# Altium PCB glasses_full_v1_small.PcbDoc (part 2 of 2)
Units mil, origin at the board's own origin, x right, y up, seen from the top; angles counter-clockwise.
Board outline 5946.88 x 2377.05 mil, 2 copper layers (Top Layer, Bottom Layer); 34 components, 50 nets, 179 pads, 116 vias.
Unrouted connection lines stored in the file: 2.
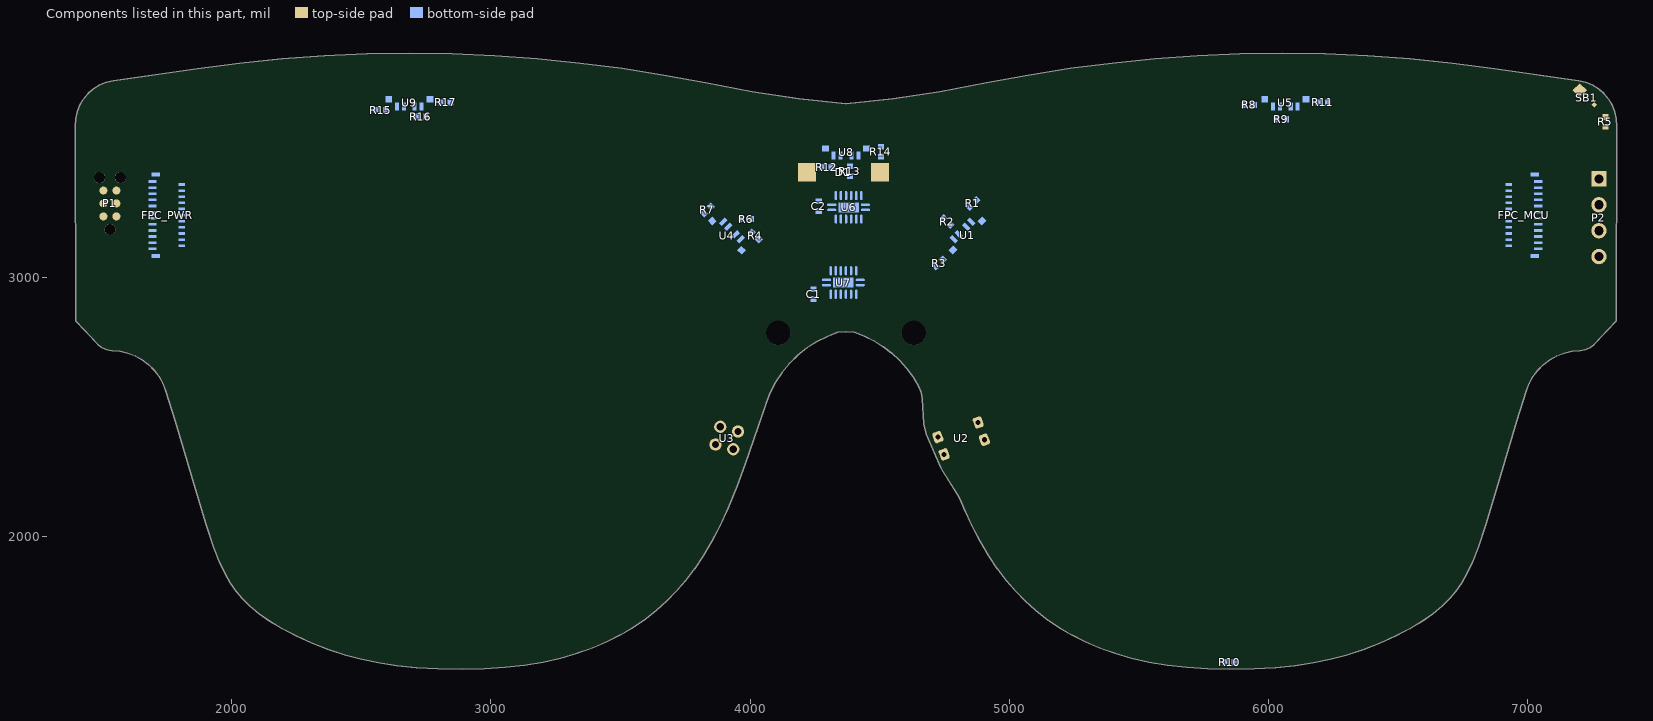
[diagram p2: the components of this part, seen from the top]

## Polygon pours and split planes (outlines as drawn) (continued)
no net on Keep-Out Layer "hol7" (none, remove dead copper): 7137.47,2923.81 7143.75,2923.31 7149.87,2921.83 7155.69,2919.4 7161.04,2916.08 7165.8,2911.95 7169.85,2907.13 7173.09,2901.73 7175.44,2895.88 7176.83,2889.74 7177.23,2883.45 7176.64,2877.18 7175.07,2871.08 7172.55,2865.31 7169.15,2860.01 7164.95,2855.3 7160.07,2851.33 7154.62,2848.17 7148.74,2845.91 7142.57,2844.61 7138.57,2844.3 7134.56,2844.39 7128.33,2845.35 7122.33,2847.28 7116.72,2850.13 7111.62,2853.84 7107.18,2858.3 7103.49,2863.41 7100.66,2869.03 7098.75,2875.03 7097.81,2881.26 7097.87,2887.56 7098.92,2893.77 7100.94,2899.74 7103.88,2905.31 7107.65,2910.35 7112.18,2914.73 7117.35,2918.34 7123.01,2921.09 7129.05,2922.91 7133.23,2923.59
GND on Top Layer "Top Gnd" (solid, remove dead copper, pour order 11): 197 vertices, not listed, extent 1396.56,1487.18 7343.44,3864.22
GND on Bottom Layer "Bot Gnd" (solid, remove dead copper, pour order 13): 197 vertices, not listed, extent 1396.56,1487.18 7343.44,3864.22

## Keep-outs
Keep-Out Layer:
  lines w7.87: 1778.36,2444.65 1778.37,2444.62 ; 1778.38,2444.58 1778.37,2444.62 ; 6961.62,2444.58 6961.63,2444.62 ; 6961.64,2444.65 6961.63,2444.62 ; 7345.88,3612.53 7345.88,3612.53 ; 1392.62,3583.93 cw(c1396.56,3583.93) 1392.63,3584.13 ; 1392.62,3583.93 cw(c1396.56,3583.93) 1392.63,3584.13 ; 1392.62,3583.93 1393.81,2831.62 ; 1392.63,3584.13 1394.03,3611.9 ; 1393.81,2831.62 ccw(c1397.75,2831.62) 1394.88,2828.93 ; 1393.81,2831.62 ccw(c1397.75,2831.62) 1394.88,2828.92 ; 1394.03,3611.9 cw(c1397.97,3611.7) 1394.12,3612.53 ; 1394.03,3611.9 cw(c1397.97,3611.7) 1394.12,3612.52 ; 1394.12,3612.52 cw(c1397.97,3611.7) 1394.12,3612.53 ; 1394.12,3612.52 1394.12,3612.53 ; 1394.12,3612.53 1394.12,3612.53 ; 1394.12,3612.53 1399.98,3639.7 ; 1394.89,2828.91 cw(c1397.75,2831.62) 1394.88,2828.93 ; 1394.89,2828.91 1480.83,2737.7 ; 1394.88,2828.92 1394.89,2828.91 ; 1394.88,2828.92 1394.88,2828.93 ; 1399.98,3639.7 cw(c1403.83,3638.87) 1400.17,3640.31 1400.18,3640.33 ; 1399.98,3639.7 ccw(c1403.83,3638.87) 1399.98,3639.7 ; 1399.98,3639.7 cw(c1403.83,3638.87) 1400.18,3640.33 ; 1399.98,3639.7 1399.98,3639.7 ; 1399.98,3639.7 1399.98,3639.7 ; 1400.18,3640.33 1410.33,3666.16 ; 1410.33,3666.16 cw(c1414.01,3664.74) 1410.62,3666.75 ; 1410.33,3666.16 1410.34,3666.18 cw(c1414.01,3664.74) 1410.62,3666.74 ; 1410.62,3666.74 cw(c1414.01,3664.74) 1410.63,3666.76 ; 1410.62,3666.74 1410.62,3666.75 ; 1410.62,3666.75 1410.63,3666.76 ; 1410.63,3666.76 1424.83,3690.63 ; 1424.84,3690.64 cw(c1428.22,3688.62) 1425.21,3691.16 ; 1424.84,3690.64 ccw(c1428.22,3688.62) 1424.83,3690.63 ; 1424.84,3690.64 cw(c1428.22,3688.62) 1425.2,3691.15 ; 1424.83,3690.63 1424.84,3690.64 ; 1424.84,3690.64 1424.84,3690.64 ; 1425.21,3691.17 ccw(c1428.22,3688.62) 1425.2,3691.15 ; 1425.2,3691.15 1425.21,3691.16 ; 1425.21,3691.16 1425.21,3691.17 ; 1425.21,3691.17 1443.08,3712.43 ; 1443.1,3712.45 cw(c1446.1,3709.91) 1443.54,3712.89 ; 1443.1,3712.45 ccw(c1446.1,3709.91) 1443.08,3712.43 ; 1443.09,3712.44 cw(c1446.1,3709.91) 1443.54,3712.89 ; 1443.08,3712.43 1443.09,3712.44 ; 1443.09,3712.44 1443.1,3712.45 ; 1443.54,3712.89 1464.62,3731.01 ; 1464.62,3731.01 cw(c1467.19,3728.02) 1465.14,3731.39 ; 1464.62,3731.01 cw(c1467.19,3728.02) 1465.14,3731.39 ; 1465.14,3731.39 1488.86,3745.86 ; 1480.84,2737.7 ccw(c1483.7,2740.4) 1481.27,2737.3 ; 1480.83,2737.7 ccw(c1483.7,2740.4) 1480.84,2737.69 ; 1480.84,2737.69 ccw(c1483.7,2740.4) 1481.27,2737.3 ; 1480.84,2737.7 1480.84,2737.69 ; 1480.83,2737.7 1480.84,2737.7 ; 1481.27,2737.3 1497.1,2724.84 ; 1488.86,3745.86 cw(c1490.92,3742.5) 1489.43,3746.15 ; 1488.86,3745.86 cw(c1490.92,3742.5) 1489.45,3746.16 ; 1489.43,3746.15 1489.45,3746.16 ; 1489.45,3746.16 1515.17,3756.61 ; 1497.1,2724.84 ccw(c1499.53,2727.93) 1497.98,2724.32 ; 1497.1,2724.84 ccw(c1499.53,2727.93) 1497.98,2724.32 ; 1497.98,2724.32 1516.48,2716.34 ; 1515.17,3756.61 cw(c1516.67,3752.96) 1515.8,3756.8 ; 1515.17,3756.61 1515.19,3756.61 cw(c1516.67,3752.96) 1515.82,3756.81 ; 1515.8,3756.8 1515.82,3756.81 ; 1515.82,3756.81 1542.88,3762.97 ; 1516.48,2716.34 ccw(c1518.04,2719.96) 1517.46,2716.07 ; 1516.48,2716.34 ccw(c1518.04,2719.96) 1517.46,2716.07 ; 1517.46,2716.07 1537.4,2713.12 ; 1537.4,2713.12 ccw(c1537.97,2717.02) 1537.64,2713.09 ; 1537.4,2713.12 ccw(c1537.97,2717.02) 1537.65,2713.09 ; 1537.64,2713.09 1537.65,2713.09 ; 1537.65,2713.09 1568.03,2710.47 1597.51,2703.73 1625.76,2692.97 1652.25,2678.39 1676.47,2660.29 1697.94,2639.01 1716.26,2614.95 1731.07,2588.6 1742.14,2560.31 1778.37,2444.62 ; 1542.88,3762.97 cw(c1543.77,3759.13) 1543.21,3763.03 ; 1542.9,3762.97 cw(c1543.77,3759.13) 1543.21,3763.03 ; 1542.88,3762.97 1542.9,3762.97 ; 1543.21,3763.03 1866.84,3809.53 ; 1778.37,2444.62 1854.67,2184.3 ; 1854.67,2184.3 ccw(c1858.45,2185.41) 1854.68,2184.26 ; 1854.67,2184.3 ccw(c1858.45,2185.41) 1854.67,2184.3 ; 1854.67,2184.3 ccw(c1858.45,2185.41) 1854.68,2184.26 ; 1854.67,2184.3 1854.67,2184.3 ; 1854.67,2184.3 1854.67,2184.3 ; 1854.68,2184.26 1897.37,2043.4 ; 1866.84,3809.53 cw(c1867.4,3805.63) 1866.89,3809.54 ; 1866.84,3809.53 cw(c1867.4,3805.63) 1866.89,3809.54 ; 1866.89,3809.54 2029.86,3830.59 ; 1897.37,2043.4 ccw(c1901.14,2044.54) 1897.41,2043.27 ; 1897.37,2043.4 ccw(c1901.14,2044.54) 1897.42,2043.26 ; 1897.42,2043.26 1927.54,1955.15 ; 1897.41,2043.27 1897.42,2043.26 ; 1927.54,1955.15 ccw(c1931.27,1956.41) 1927.61,1954.97 ; 1927.54,1955.14 ccw(c1931.27,1956.41) 1927.61,1954.97 ; 1927.54,1955.15 1927.54,1955.14 ; 1927.61,1954.97 1948.71,1901.38 ; 1948.71,1901.38 ccw(c1952.37,1902.82) 1948.81,1901.14 ; 1948.71,1901.38 ccw(c1952.37,1902.82) 1948.81,1901.15 ; 1948.81,1901.14 1969.4,1857.19 ; 1948.81,1901.15 1948.81,1901.14 ; 1969.4,1857.18 ccw(c1972.97,1858.85) 1969.54,1856.91 ; 1969.4,1857.19 ccw(c1972.97,1858.85) 1969.54,1856.91 ; 1969.4,1857.19 1969.4,1857.18 ; 1969.54,1856.91 ccw(c1972.97,1858.85) 1969.55,1856.9 ; 1969.55,1856.9 1991.03,1819.04 ; 1969.54,1856.91 1969.55,1856.9 ; 1969.54,1856.91 1969.54,1856.91 ; 1991.03,1819.04 ccw(c1994.46,1820.98) 1991.22,1818.74 ; 1991.03,1819.04 ccw(c1994.46,1820.98) 1991.04,1819.03 ; 1991.04,1819.03 ccw(c1994.46,1820.98) 1991.22,1818.74 ; 1991.03,1819.04 1991.04,1819.03 ; 1991.03,1819.04 1991.03,1819.04 ; 1991.22,1818.74 2014.14,1785.6 ; 2014.14,1785.6 ccw(c2017.38,1787.84) 2014.37,1785.3 ; 2014.14,1785.6 ccw(c2017.38,1787.84) 2014.37,1785.3 ; 2014.37,1785.3 2037.26,1758.09 ; 2029.86,3830.59 cw(c2030.36,3826.68) 2029.97,3830.6 2029.99,3830.6 ; 2029.86,3830.59 cw(c2030.36,3826.68) 2029.99,3830.6 ; 2029.99,3830.6 2193.44,3846.99 ; 2037.26,1758.09 ccw(c2040.28,1760.63) 2037.52,1757.81 2037.53,1757.8 ; 2037.26,1758.09 ccw(c2040.28,1760.63) 2037.53,1757.8 ; 2037.53,1757.8 2066.73,1729.24 ; 2066.73,1729.24 ccw(c2069.5,1732.04) 2066.99,1729 ; 2066.74,1729.23 ccw(c2069.5,1732.04) 2066.99,1729 ; 2066.73,1729.24 2066.74,1729.23 ; 2066.99,1729 2103.24,1699.17 ; 2103.24,1699.17 ccw(c2105.74,1702.21) 2103.46,1699 ; 2103.24,1699.17 ccw(c2105.74,1702.21) 2103.46,1698.99 ; 2103.46,1699 ccw(c2105.74,1702.21) 2103.47,1698.99 ; 2103.46,1699 2103.46,1698.99 ; 2103.46,1698.99 2103.47,1698.99 ; 2103.47,1698.99 2144.33,1670.09 ; 2144.33,1670.09 ccw(c2146.61,1673.3) 2144.34,1670.08 ; 2144.34,1670.08 ccw(c2146.61,1673.3) 2144.56,1669.94 ; 2144.34,1670.08 ccw(c2146.61,1673.3) 2144.55,1669.94 ; 2144.33,1670.09 2144.34,1670.08 ; 2144.34,1670.08 2144.34,1670.08 ; 2144.55,1669.94 ccw(c2146.61,1673.3) 2144.57,1669.93 ; 2144.55,1669.94 2144.56,1669.94 ; 2144.56,1669.94 2144.57,1669.93 ; 2144.57,1669.93 2191.07,1641.58 ; 2191.07,1641.58 ccw(c2193.13,1644.93) 2191.09,1641.57 ; 2191.07,1641.58 2191.08,1641.57 ; 2191.09,1641.57 ccw(c2193.13,1644.93) 2191.29,1641.45 ; 2191.08,1641.57 ccw(c2193.13,1644.93) 2191.29,1641.45 ; 2191.08,1641.57 2191.09,1641.57 ; 2191.29,1641.45 2245.3,1613.03 ; 2193.44,3846.99 cw(c2193.86,3843.08) 2193.57,3847 ; 2193.46,3847 cw(c2193.86,3843.08) 2193.57,3847 ; 2193.44,3846.99 2193.46,3847 ; 2193.57,3847 2357.47,3858.73 ; 2245.3,1613.03 ccw(c2247.13,1616.52) 2245.5,1612.93 ; 2245.3,1613.03 ccw(c2247.13,1616.52) 2245.5,1612.93 ; 2245.5,1612.93 ccw(c2247.13,1616.52) 2245.51,1612.93 ; 2245.5,1612.93 2245.5,1612.93 ; 2245.5,1612.93 2245.51,1612.93 ; 2245.51,1612.93 2309,1584.09 ; 2309.01,1584.08 ccw(c2310.64,1587.67) 2309.21,1584 ; 2309,1584.09 ccw(c2310.64,1587.67) 2309.02,1584.08 ; 2309.02,1584.08 ccw(c2310.64,1587.67) 2309.22,1584 ; 2309,1584.09 2309.01,1584.08 ; 2309.01,1584.08 2309.02,1584.08 ; 2309.21,1584 ccw(c2310.64,1587.67) 2309.23,1583.99 ; 2309.21,1584 2309.22,1584 ; 2309.22,1584 2309.23,1583.99 ; 2309.23,1583.99 2373.56,1559.12 ; 2357.47,3858.73 cw(c2357.75,3854.8) 2357.58,3858.74 ; 2357.47,3858.73 cw(c2357.75,3854.8) 2357.58,3858.74 ; 2357.58,3858.74 2521.75,3865.79 ; 2373.57,1559.12 ccw(c2374.99,1562.79) 2373.8,1559.04 ; 2373.56,1559.12 ccw(c2374.99,1562.79) 2373.58,1559.12 ; 2373.56,1559.12 2373.57,1559.12 ; 2373.57,1559.12 2373.58,1559.12 ; 2373.58,1559.12 ccw(c2374.99,1562.79) 2373.78,1559.04 ; 2373.78,1559.04 2373.8,1559.04 ; 2373.8,1559.04 2438.76,1538.17 ; 2438.77,1538.17 ccw(c2439.98,1541.92) 2438.99,1538.11 ; 2438.76,1538.17 ccw(c2439.98,1541.92) 2438.99,1538.11 ; 2438.76,1538.17 2438.77,1538.17 ; 2438.99,1538.11 2500.65,1522.08 ; 2500.65,1522.08 ccw(c2501.64,1525.89) 2500.84,1522.03 ; 2500.65,1522.08 ccw(c2501.64,1525.89) 2500.85,1522.03 ; 2500.84,1522.03 ccw(c2501.64,1525.89) 2500.85,1522.03 ; 2500.84,1522.03 2500.85,1522.03 ; 2500.85,1522.03 2500.85,1522.03 ; 2500.85,1522.03 2566.6,1508.57 ; 2521.75,3865.79 cw(c2521.92,3861.86) 2521.86,3865.79 ; 2521.75,3865.79 cw(c2521.92,3861.86) 2521.86,3865.79 ; 2521.86,3865.79 2686.16,3868.16 ; 2566.6,1508.57 ccw(c2567.39,1512.43) 2566.61,1508.57 ; 2566.61,1508.57 ccw(c2567.39,1512.43) 2566.8,1508.53 ; 2566.61,1508.57 ccw(c2567.39,1512.43) 2566.79,1508.54 ; 2566.6,1508.57 2566.61,1508.57 ; 2566.61,1508.57 2566.61,1508.57 ; 2566.79,1508.54 ccw(c2567.39,1512.43) 2566.81,1508.53 ; 2566.79,1508.54 2566.8,1508.54 ; 2566.8,1508.54 2566.81,1508.53 ; 2566.81,1508.53 2637.1,1497.77 ; 2637.1,1497.77 ccw(c2637.7,1501.66) 2637.31,1497.74 ; 2637.1,1497.77 ccw(c2637.7,1501.66) 2637.11,1497.77 ; 2637.11,1497.77 ccw(c2637.7,1501.66) 2637.29,1497.74 ; 2637.1,1497.77 2637.1,1497.77 ; 2637.1,1497.77 2637.11,1497.77 ; 2637.29,1497.74 2637.31,1497.74 ; 2637.31,1497.74 2712.54,1489.84 ; 2686.16,3868.16 cw(c2686.22,3864.22) 2686.27,3868.16 ; 2686.16,3868.16 cw(c2686.22,3864.22) 2686.26,3868.16 ; 2686.26,3868.16 cw(c2686.22,3864.22) 2686.28,3868.16 ; 2686.26,3868.16 2686.27,3868.16 ; 2686.27,3868.16 2686.28,3868.16 ; 2686.28,3868.16 2850.56,3865.84 ; 2712.56,1489.84 ccw(c2712.97,1493.75) 2712.75,1489.82 ; 2712.54,1489.84 ccw(c2712.97,1493.75) 2712.74,1489.82 ; 2712.54,1489.84 2712.56,1489.84 ; 2712.74,1489.82 2712.75,1489.82 ; 2712.75,1489.82 2794.56,1484.91 ; 2794.56,1484.91 ccw(c2794.81,1488.84) 2794.74,1484.9 ; 2794.57,1484.9 ccw(c2794.81,1488.84) 2794.74,1484.9 ; 2794.56,1484.91 2794.57,1484.9 ; 2794.74,1484.9 2888.52,1483.24 ; 2850.56,3865.84 cw(c2850.52,3861.91) 2850.58,3865.84 ; 2850.57,3865.84 cw(c2850.52,3861.91) 2850.7,3865.84 ; 2850.56,3865.84 2850.57,3865.84 ; 2850.57,3865.84 2850.58,3865.84 ; 2850.58,3865.84 cw(c2850.52,3861.91) 2850.68,3865.84 ; 2850.68,3865.84 2850.7,3865.84 ; 2850.7,3865.84 3014.84,3858.84 ; 2888.52,1483.24 ccw(c2888.59,1487.18) 2888.68,1483.24 ; 2888.52,1483.24 ccw(c2888.59,1487.18) 2888.68,1483.24 ; 2888.68,1483.24 2975.08,1485.3 ; 2975.08,1485.3 ccw(c2974.99,1489.24) 2975.26,1485.31 ; 2975.08,1485.3 ccw(c2974.99,1489.24) 2975.27,1485.31 ; 2975.26,1485.31 2975.27,1485.31 ; 2975.27,1485.31 3055.73,1490.84 ; 3014.84,3858.84 cw(c3014.68,3854.91) 3014.96,3858.84 3014.98,3858.83 ; 3014.85,3858.84 cw(c3014.68,3854.91) 3014.98,3858.83 ; 3014.84,3858.84 3014.85,3858.84 ; 3014.98,3858.83 3178.84,3847.16 ; 3055.75,1490.84 ccw(c3055.48,1494.77) 3055.95,1490.86 ; 3055.73,1490.84 ccw(c3055.48,1494.77) 3055.94,1490.85 ; 3055.73,1490.84 3055.75,1490.84 ; 3055.94,1490.85 3055.95,1490.86 ; 3055.95,1490.86 3131.47,1499.72 ; 3131.47,1499.72 ccw(c3131.02,1503.64) 3131.68,1499.76 ; 3131.47,1499.72 3131.48,1499.73 ccw(c3131.02,1503.64) 3131.68,1499.76 ; 3131.68,1499.76 3202.96,1511.87 ; 3178.84,3847.16 cw(c3178.58,3843.23) 3178.98,3847.15 ; 3178.86,3847.16 cw(c3178.58,3843.23) 3178.98,3847.15 ; 3178.84,3847.16 3178.86,3847.16 ; 3178.98,3847.15 3342.48,3830.8 ; 3202.96,1511.87 ccw(c3202.3,1515.75) 3203.17,1511.91 ; 3202.96,1511.87 ccw(c3202.3,1515.75) 3203.17,1511.91 ; 3203.17,1511.91 3270.48,1527.15 ; 3270.48,1527.15 ccw(c3269.61,1530.99) 3270.7,1527.21 ; 3270.48,1527.15 ccw(c3269.61,1530.99) 3270.69,1527.21 ; 3270.69,1527.21 ccw(c3269.61,1530.99) 3270.71,1527.21 ; 3270.69,1527.21 3270.7,1527.21 ; 3270.7,1527.21 3270.71,1527.21 ; 3270.71,1527.21 3333.71,1545.29 ; 3333.71,1545.29 ccw(c3332.63,1549.08) 3333.72,1545.3 ; 3333.72,1545.3 ccw(c3332.63,1549.08) 3333.94,1545.37 ; 3333.72,1545.3 ccw(c3332.63,1549.08) 3333.96,1545.37 ; 3333.71,1545.29 3333.72,1545.3 ; 3333.72,1545.3 3333.72,1545.3 ; 3333.94,1545.37 3333.96,1545.37 ; 3333.96,1545.37 3392.9,1566.18 ; 3342.48,3830.8 cw(c3342.08,3826.89) 3342.59,3830.79 ; 3342.48,3830.8 cw(c3342.08,3826.89) 3342.6,3830.79 ; 3342.59,3830.79 3342.6,3830.79 ; 3342.6,3830.79 3505.55,3809.8 ; 3392.9,1566.18 ccw(c3391.61,1569.9) 3393.15,1566.28 ; 3392.92,1566.19 ccw(c3391.61,1569.9) 3393.15,1566.28 ; 3392.9,1566.18 3392.92,1566.19 ; 3393.15,1566.28 3448.34,1589.77 ; 3448.34,1589.77 ccw(c3446.79,1593.39) 3448.57,1589.88 ; 3448.34,1589.77 ccw(c3446.79,1593.39) 3448.57,1589.88 ; 3448.57,1589.88 3501.63,1616.74 ; 3501.63,1616.74 ccw(c3499.85,1620.26) 3501.86,1616.87 ; 3501.63,1616.74 ccw(c3499.85,1620.26) 3501.86,1616.87 ; 3501.86,1616.87 3552.39,1646.89 ; 3505.56,3809.79 cw(c3505.05,3805.89) 3505.67,3809.78 ; 3505.55,3809.8 cw(c3505.05,3805.89) 3505.67,3809.78 ; 3505.55,3809.8 3505.56,3809.79 ; 3505.67,3809.78 3667.97,3784.14 ; 3552.39,1646.89 ccw(c3550.37,1650.28) 3552.61,1647.04 ; 3552.39,1646.89 ccw(c3550.37,1650.28) 3552.61,1647.04 ; 3552.61,1647.04 3600.28,1679.95 ; 3600.28,1679.95 ccw(c3598.04,1683.2) 3600.49,1680.11 ; 3600.28,1679.95 ccw(c3598.04,1683.2) 3600.49,1680.11 ; 3600.49,1680.11 3641.38,1712.54 ; 3641.38,1712.54 ccw(c3638.94,1715.62) 3641.57,1712.7 ; 3641.38,1712.54 ccw(c3638.94,1715.62) 3641.57,1712.7 ; 3641.57,1712.7 3680.91,1748.15 ; 3667.97,3784.14 cw(c3667.36,3780.25) 3668.08,3784.12 ; 3667.97,3784.14 cw(c3667.36,3780.25) 3668.08,3784.12 ; 3668.08,3784.12 3829.59,3753.87 4008.94,3720.8 4189.25,3693.88 4370,3673.18 4550.75,3693.88 4731.06,3720.8 4910.42,3753.87 5071.92,3784.12 ; 3680.91,1748.15 ccw(c3678.27,1751.08) 3681.09,1748.32 3681.1,1748.34 ; 3680.91,1748.15 ccw(c3678.27,1751.08) 3681.1,1748.34 ; 3681.1,1748.34 3718.65,1786.67 ; 3718.65,1786.67 ccw(c3715.85,1789.44) 3718.83,1786.86 ; 3718.65,1786.67 3718.66,1786.69 ccw(c3715.85,1789.44) 3718.83,1786.86 ; 3718.83,1786.86 3754.43,1827.97 ; 3754.43,1827.97 ccw(c3751.46,1830.55) 3754.59,1828.16 3754.6,1828.18 ; 3754.43,1827.97 ccw(c3751.46,1830.55) 3754.6,1828.18 ; 3754.6,1828.18 3788.93,1873.07 ; 3788.93,1873.07 ccw(c3785.81,1875.48) 3789.07,1873.28 ; 3788.93,1873.07 3788.94,1873.09 ccw(c3785.81,1875.48) 3789.07,1873.27 ; 3789.07,1873.27 ccw(c3785.81,1875.48) 3789.08,1873.29 ; 3789.07,1873.27 3789.07,1873.28 ; 3789.07,1873.28 3789.08,1873.29 ; 3789.08,1873.29 3822.53,1922.88 ; 3822.54,1922.88 ccw(c3819.27,1925.09) 3822.65,1923.06 ; 3822.53,1922.88 ccw(c3819.27,1925.09) 3822.54,1922.89 ; 3822.54,1922.89 ccw(c3819.27,1925.09) 3822.66,1923.07 ; 3822.53,1922.88 3822.54,1922.88 ; 3822.54,1922.88 3822.54,1922.89 ; 3822.65,1923.06 ccw(c3819.27,1925.09) 3822.66,1923.08 ; 3822.65,1923.06 3822.66,1923.07 ; 3822.66,1923.07 3822.66,1923.08 ; 3822.66,1923.08 3855.33,1977.92 ; 3855.33,1977.92 ccw(c3851.95,1979.95) 3855.34,1977.94 ; 3855.33,1977.92 3855.33,1977.93 ; 3855.34,1977.94 ccw(c3851.95,1979.95) 3855.43,1978.11 ; 3855.33,1977.93 ccw(c3851.95,1979.95) 3855.43,1978.11 ; 3855.33,1977.93 3855.34,1977.94 ; 3855.43,1978.11 3887.5,2039.09 ; 3887.5,2039.09 ccw(c3884.02,2040.92) 3887.59,2039.26 ; 3887.5,2039.09 ccw(c3884.02,2040.92) 3887.59,2039.26 ; 3887.59,2039.26 3919.79,2108.66 ; 3919.79,2108.66 ccw(c3916.22,2110.32) 3919.86,2108.82 ; 3919.79,2108.66 ccw(c3916.22,2110.32) 3919.86,2108.82 ; 3919.86,2108.82 3954.36,2193.04 ; 3954.36,2193.04 ccw(c3950.71,2194.53) 3954.41,2193.17 ; 3954.36,2193.04 ccw(c3950.71,2194.53) 3954.41,2193.17 ; 3954.41,2193.17 3985.7,2277.98 ; 3985.7,2277.98 ccw(c3982.01,2279.35) 3985.74,2278.08 ; 3985.7,2277.98 ccw(c3982.01,2279.35) 3985.73,2278.06 3985.74,2278.08 ; 3985.74,2278.08 4035.51,2422.72 ; 4035.51,2422.72 ccw(c4031.79,2424.01) 4035.52,2422.76 ; 4035.51,2422.72 4035.51,2422.73 ; 4035.51,2422.73 ccw(c4031.79,2424.01) 4035.52,2422.77 ; 4035.52,2422.76 4035.52,2422.77 ; 4035.52,2422.77 4065.69,2513.14 4081.92,2554.46 4102.3,2593.78 4126.66,2630.77 4154.72,2665.03 4186.19,2696.2 4220.73,2723.92 4257.95,2747.92 4297.47,2767.91 4338.54,2783.58 4370,2786.47 4401.47,2783.58 4439.6,2769.2 4476.48,2751.05 4511.43,2729.44 4544.14,2704.56 4574.31,2676.64 4601.64,2645.95 4625.88,2612.77 4646.76,2577.5 4655.75,2555.03 4659.84,2531.08 4665.97,2434.57 ; 4665.97,2434.57 ccw(c4669.9,2434.82) 4666.07,2433.89 ; 4665.97,2434.57 ccw(c4669.9,2434.82) 4666.07,2433.89 ; 4666.07,2433.89 4675.91,2393.63 ; 4675.91,2393.63 ccw(c4679.73,2394.57) 4676.14,2392.96 ; 4675.91,2393.63 ccw(c4679.73,2394.57) 4676.13,2392.98 4676.14,2392.96 ; 4676.14,2392.96 4732.59,2265.2 ; 4732.59,2265.2 ccw(c4736.2,2266.78) 4732.72,2264.93 ; 4732.6,2265.19 ccw(c4736.2,2266.78) 4732.72,2264.93 ; 4732.59,2265.2 4732.6,2265.19 ; 4732.72,2264.93 4740.72,2249.87 ; 4740.72,2249.87 ccw(c4744.2,2251.72) 4740.86,2249.63 ; 4740.72,2249.87 ccw(c4744.2,2251.72) 4740.86,2249.63 ; 4740.87,2249.62 cw(c4744.2,2251.72) 4740.86,2249.63 ; 4740.87,2249.62 4797.7,2159.09 4806.81,2141.36 4820.14,2108.82 ; 4740.87,2249.62 4740.86,2249.63 ; 4740.86,2249.63 4740.86,2249.63 ; 4820.14,2108.82 ccw(c4823.78,2110.32) 4820.21,2108.66 ; 4820.14,2108.82 ccw(c4823.78,2110.32) 4820.21,2108.66 ; 4820.21,2108.66 4852.41,2039.26 ; 4852.41,2039.26 ccw(c4855.98,2040.92) 4852.5,2039.09 ; 4852.41,2039.26 ccw(c4855.98,2040.92) 4852.5,2039.09 ; 4852.5,2039.09 4884.56,1978.11 ; 4884.56,1978.11 ccw(c4888.05,1979.95) 4884.66,1977.94 ; 4884.56,1978.11 ccw(c4888.05,1979.95) 4884.67,1977.93 ; 4884.67,1977.92 cw(c4888.05,1979.95) 4884.66,1977.94 ; 4884.67,1977.92 4917.34,1923.08 ; 4884.67,1977.92 4884.67,1977.93 ; 4884.66,1977.94 4884.67,1977.93 ; 4917.34,1923.07 ccw(c4920.73,1925.09) 4917.46,1922.89 ; 4917.35,1923.06 cw(c4920.73,1925.09) 4917.34,1923.08 ; 4917.35,1923.06 ccw(c4920.73,1925.09) 4917.46,1922.88 ; 4917.34,1923.07 4917.35,1923.06 ; 4917.34,1923.07 4917.34,1923.08 ; 4917.46,1922.89 ccw(c4920.73,1925.09) 4917.47,1922.88 ; 4917.47,1922.88 4950.92,1873.29 ; 4917.46,1922.88 4917.47,1922.88 ; 4917.46,1922.89 4917.46,1922.88 ; 4950.92,1873.29 ccw(c4954.19,1875.48) 4950.93,1873.27 ; 4950.92,1873.28 ccw(c4954.19,1875.48) 4951.07,1873.07 ; 4950.93,1873.28 4950.93,1873.27 ; 4950.92,1873.29 4950.93,1873.28 ; 4950.93,1873.27 ccw(c4954.19,1875.48) 4951.06,1873.09 4951.07,1873.07 ; 4951.07,1873.07 4985.4,1828.18 ; 4985.4,1828.18 ccw(c4988.54,1830.55) 4985.56,1827.97 ; 4985.4,1828.18 4985.41,1828.16 ccw(c4988.54,1830.55) 4985.56,1827.97 ; 4985.56,1827.97 5021.17,1786.86 ; 5021.17,1786.86 ccw(c5024.15,1789.44) 5021.35,1786.67 ; 5021.17,1786.86 ccw(c5024.15,1789.44) 5021.33,1786.69 5021.35,1786.67 ; 5021.35,1786.67 5058.9,1748.34 ; 5058.9,1748.34 ccw(c5061.73,1751.08) 5059.09,1748.15 ; 5058.9,1748.34 5058.91,1748.32 ccw(c5061.73,1751.08) 5059.09,1748.15 ; 5059.09,1748.15 5098.43,1712.7 ; 5071.92,3784.12 cw(c5072.64,3780.25) 5072.03,3784.14 ; 5071.92,3784.12 cw(c5072.64,3780.25) 5072.03,3784.14 ; 5072.03,3784.14 5234.33,3809.78 ; 5098.43,1712.7 ccw(c5101.06,1715.62) 5098.62,1712.54 ; 5098.43,1712.7 ccw(c5101.06,1715.62) 5098.62,1712.54 ; 5098.62,1712.54 5139.51,1680.11 ; 5139.51,1680.11 ccw(c5141.96,1683.2) 5139.72,1679.95 ; 5139.51,1680.11 ccw(c5141.96,1683.2) 5139.72,1679.95 ; 5139.72,1679.95 5187.39,1647.04 ; 5187.39,1647.04 ccw(c5189.62,1650.28) 5187.61,1646.89 ; 5187.39,1647.04 ccw(c5189.62,1650.28) 5187.61,1646.89 ; 5187.61,1646.89 5238.14,1616.87 ; 5234.33,3809.78 cw(c5234.95,3805.89) 5234.44,3809.79 ; 5234.33,3809.78 cw(c5234.95,3805.89) 5234.44,3809.79 ; 5234.45,3809.79 ccw(c5234.95,3805.89) 5234.44,3809.79 ; 5234.44,3809.79 5234.44,3809.79 ; 5234.44,3809.79 5234.45,3809.79 ; 5234.45,3809.79 5397.4,3830.79 ; 5238.14,1616.87 ccw(c5240.15,1620.26) 5238.37,1616.74 ; 5238.14,1616.87 ccw(c5240.15,1620.26) 5238.37,1616.74 ; 5238.37,1616.74 5291.43,1589.88 ; 5291.43,1589.88 ccw(c5293.21,1593.39) 5291.66,1589.77 ; 5291.43,1589.88 ccw(c5293.21,1593.39) 5291.66,1589.77 ; 5291.66,1589.77 5346.85,1566.28 ; 5346.85,1566.28 ccw(c5348.39,1569.9) 5347.1,1566.18 ; 5346.85,1566.28 ccw(c5348.39,1569.9) 5347.08,1566.19 ; 5347.08,1566.19 5347.1,1566.18 ; 5347.1,1566.18 5406.04,1545.37 ; 5397.42,3830.79 cw(c5397.91,3826.89) 5397.52,3830.81 ; 5397.42,3830.79 ccw(c5397.91,3826.89) 5397.4,3830.79 ; 5397.41,3830.79 cw(c5397.91,3826.89) 5397.52,3830.81 ; 5397.4,3830.79 5397.41,3830.79 ; 5397.41,3830.79 5397.42,3830.79 ; 5397.52,3830.81 5561.02,3847.15 ; 5406.06,1545.37 ccw(c5407.37,1549.08) 5406.28,1545.3 ; 5406.04,1545.37 ccw(c5407.37,1549.08) 5406.28,1545.3 ; 5406.04,1545.37 5406.06,1545.37 ; 5406.28,1545.3 ccw(c5407.37,1549.08) 5406.29,1545.29 ; 5406.28,1545.3 5406.28,1545.3 ; 5406.28,1545.3 5406.29,1545.29 ; 5406.29,1545.29 5469.29,1527.21 ; 5469.3,1527.21 ccw(c5470.39,1531) 5469.52,1527.15 ; 5469.29,1527.21 ccw(c5470.39,1531) 5469.31,1527.21 ; 5469.31,1527.21 ccw(c5470.39,1531) 5469.52,1527.15 ; 5469.29,1527.21 5469.3,1527.21 ; 5469.3,1527.21 5469.31,1527.21 ; 5469.52,1527.15 5536.83,1511.91 ; 5536.83,1511.91 ccw(c5537.7,1515.76) 5537.04,1511.87 ; 5536.83,1511.91 ccw(c5537.7,1515.76) 5537.04,1511.87 ; 5537.04,1511.87 5608.32,1499.76 ; 5561.02,3847.15 cw(c5561.41,3843.23) 5561.13,3847.16 ; 5561.02,3847.15 cw(c5561.41,3843.23) 5561.15,3847.16 ; 5561.14,3847.16 5561.15,3847.16 ; 5561.15,3847.16 5725.02,3858.83 ; 5608.32,1499.76 ccw(c5608.98,1503.64) 5608.53,1499.73 ; 5608.32,1499.76 ccw(c5608.98,1503.64) 5608.52,1499.73 5608.53,1499.73 ; 5608.53,1499.73 5684.05,1490.86 ; 5684.06,1490.86 ccw(c5684.52,1494.77) 5684.27,1490.84 ; 5684.05,1490.86 ccw(c5684.52,1494.77) 5684.25,1490.84 ; 5684.05,1490.86 5684.06,1490.86 ; 5684.25,1490.84 5684.27,1490.84 ; 5684.27,1490.84 5764.73,1485.31 ; 5725.02,3858.83 cw(c5725.32,3854.91) 5725.15,3858.84 ; 5725.02,3858.83 5725.04,3858.84 cw(c5725.32,3854.91) 5725.16,3858.84 ; 5725.15,3858.84 5725.16,3858.84 ; 5725.16,3858.84 5889.3,3865.84 ; 5764.74,1485.31 ccw(c5765.01,1489.24) 5764.92,1485.3 ; 5764.73,1485.31 ccw(c5765.01,1489.24) 5764.92,1485.3 ; 5764.73,1485.31 5764.74,1485.31 ; 5764.92,1485.3 5851.32,1483.24 ; 5851.32,1483.24 ccw(c5851.41,1487.18) 5851.48,1483.24 ; 5851.32,1483.24 ccw(c5851.41,1487.18) 5851.48,1483.24 ; 5851.48,1483.24 5945.26,1484.9 ; 5889.3,3865.84 cw(c5889.48,3861.91) 5889.43,3865.84 ; 5889.31,3865.84 cw(c5889.48,3861.91) 5889.42,3865.84 ; 5889.3,3865.84 5889.31,3865.84 ; 5889.42,3865.84 cw(c5889.48,3861.91) 5889.44,3865.84 ; 5889.42,3865.84 5889.43,3865.84 ; 5889.43,3865.84 5889.44,3865.84 ; 5889.44,3865.84 6053.72,3868.16 ; 5945.26,1484.9 ccw(c5945.19,1488.84) 5945.42,1484.9 5945.44,1484.91 ; 5945.26,1484.9 ccw(c5945.19,1488.84) 5945.44,1484.91 ; 5945.44,1484.91 6027.25,1489.82 ; 6027.26,1489.82 ccw(c6027.03,1493.75) 6027.46,1489.84 ; 6027.25,1489.82 ccw(c6027.03,1493.75) 6027.44,1489.84 ; 6027.25,1489.82 6027.26,1489.82 ; 6027.44,1489.84 6027.46,1489.84 ; 6027.46,1489.84 6102.69,1497.74 ; 6053.72,3868.16 cw(c6053.78,3864.22) 6053.73,3868.16 ; 6053.72,3868.16 6053.73,3868.16 ; 6053.73,3868.16 cw(c6053.78,3864.22) 6053.84,3868.16 ; 6053.73,3868.16 cw(c6053.78,3864.22) 6053.84,3868.16 ; 6053.73,3868.16 6053.73,3868.16 ; 6053.84,3868.16 6218.14,3865.79 ; 6102.71,1497.74 ccw(c6102.3,1501.66) 6102.89,1497.77 ; 6102.69,1497.74 ccw(c6102.3,1501.66) 6102.9,1497.77 ; 6102.69,1497.74 6102.71,1497.74 ; 6102.89,1497.77 ccw(c6102.3,1501.66) 6102.9,1497.77 ; 6102.89,1497.77 6102.9,1497.77 ; 6102.9,1497.77 6102.9,1497.77 ; 6102.9,1497.77 6173.19,1508.53 ; 6173.19,1508.53 ccw(c6172.6,1512.43) 6173.21,1508.54 ; 6173.21,1508.54 ccw(c6172.6,1512.43) 6173.39,1508.57 ; 6173.2,1508.54 ccw(c6172.6,1512.43) 6173.39,1508.57 ; 6173.19,1508.53 6173.2,1508.54 ; 6173.2,1508.54 6173.21,1508.54 ; 6173.39,1508.57 ccw(c6172.6,1512.43) 6173.4,1508.57 ; 6173.39,1508.57 6173.39,1508.57 ; 6173.39,1508.57 6173.4,1508.57 ; 6173.4,1508.57 6239.15,1522.03 ; 6218.14,3865.79 cw(c6218.08,3861.86) 6218.25,3865.79 ; 6218.14,3865.79 cw(c6218.08,3861.86) 6218.25,3865.79 ; 6218.25,3865.79 6382.41,3858.74 ; 6239.15,1522.03 ccw(c6238.36,1525.89) 6239.16,1522.03 ; 6239.16,1522.03 ccw(c6238.36,1525.89) 6239.35,1522.08 ; 6239.15,1522.03 ccw(c6238.36,1525.89) 6239.35,1522.08 ; 6239.15,1522.03 6239.15,1522.03 ; 6239.15,1522.03 6239.16,1522.03 ; 6239.35,1522.08 6301.01,1538.11 ; 6301.01,1538.11 ccw(c6300.02,1541.92) 6301.22,1538.17 6301.24,1538.17 ; 6301.01,1538.11 ccw(c6300.02,1541.92) 6301.24,1538.17 ; 6301.24,1538.17 6366.2,1559.04 ; 6366.2,1559.04 ccw(c6365.01,1562.79) 6366.43,1559.12 ; 6366.22,1559.05 ccw(c6365.01,1562.79) 6366.42,1559.12 ; 6366.2,1559.04 6366.22,1559.05 ; 6366.42,1559.12 ccw(c6365.01,1562.79) 6366.44,1559.12 ; 6366.42,1559.12 6366.43,1559.12 ; 6366.43,1559.12 6366.44,1559.12 ; 6366.44,1559.12 6430.77,1583.99 ; 6382.41,3858.74 cw(c6382.25,3854.81) 6382.53,3858.73 ; 6382.41,3858.74 cw(c6382.25,3854.81) 6382.53,3858.73 ; 6382.53,3858.73 6546.42,3847.01 ; 6430.77,1583.99 ccw(c6429.36,1587.67) 6430.79,1584 ; 6430.77,1583.99 6430.78,1584 ; 6430.79,1584 ccw(c6429.36,1587.67) 6430.99,1584.08 ; 6430.78,1584 ccw(c6429.36,1587.67) 6430.98,1584.08 ; 6430.78,1584 6430.79,1584 ; 6430.98,1584.08 ccw(c6429.36,1587.67) 6431,1584.09 ; 6430.98,1584.08 6430.99,1584.08 ; 6430.99,1584.08 6431,1584.09 ; 6431,1584.09 6494.49,1612.93 ; 6494.5,1612.93 ccw(c6492.87,1616.52) 6494.7,1613.03 ; 6494.49,1612.93 ccw(c6492.87,1616.52) 6494.5,1612.93 ; 6494.5,1612.93 ccw(c6492.87,1616.52) 6494.7,1613.03 ; 6494.49,1612.93 6494.5,1612.93 ; 6494.5,1612.93 6494.5,1612.93 ; 6494.7,1613.03 6548.71,1641.45 ; 6546.42,3847.01 cw(c6546.14,3843.08) 6546.56,3846.99 ; 6546.42,3847.01 cw(c6546.14,3843.08) 6546.54,3847 ; 6546.54,3847 6546.56,3846.99 ; 6546.56,3846.99 6710.01,3830.6 ; 6548.71,1641.45 ccw(c6546.87,1644.94) 6548.92,1641.57 ; 6548.71,1641.45 ccw(c6546.87,1644.94) 6548.91,1641.57 ; 6548.91,1641.57 ccw(c6546.87,1644.94) 6548.93,1641.58 ; 6548.91,1641.57 6548.92,1641.57 ; 6548.92,1641.57 6548.93,1641.58 ; 6548.93,1641.58 6595.43,1669.93 ; 6595.43,1669.93 ccw(c6593.39,1673.3) 6595.45,1669.94 ; 6595.45,1669.94 ccw(c6593.39,1673.3) 6595.66,1670.08 ; 6595.44,1669.94 ccw(c6593.39,1673.3) 6595.65,1670.08 ; 6595.43,1669.93 6595.44,1669.94 ; 6595.44,1669.94 6595.45,1669.94 ; 6595.65,1670.08 ccw(c6593.39,1673.3) 6595.67,1670.09 ; 6595.65,1670.08 6595.66,1670.08 ; 6595.66,1670.08 6595.67,1670.09 ; 6595.67,1670.09 6636.53,1698.99 ; 6636.53,1698.99 ccw(c6634.26,1702.21) 6636.54,1699 ; 6636.54,1699 ccw(c6634.26,1702.21) 6636.76,1699.17 ; 6636.53,1698.99 ccw(c6634.26,1702.21) 6636.76,1699.17 ; 6636.53,1698.99 6636.53,1698.99 ; 6636.53,1698.99 6636.54,1699 ; 6636.76,1699.17 6673.01,1729 ; 6673.01,1729 ccw(c6670.5,1732.04) 6673.27,1729.24 ; 6673.01,1729 ccw(c6670.5,1732.04) 6673.26,1729.23 ; 6673.26,1729.23 6673.27,1729.24 ; 6673.27,1729.24 6702.47,1757.8 ; 6702.47,1757.8 ccw(c6699.72,1760.63) 6702.74,1758.09 ; 6702.47,1757.8 6702.48,1757.81 ccw(c6699.72,1760.63) 6702.74,1758.09 ; 6702.74,1758.09 6725.63,1785.3 ; 6710.01,3830.6 cw(c6709.64,3826.68) 6710.14,3830.59 ; 6710.01,3830.6 6710.03,3830.6 cw(c6709.64,3826.68) 6710.14,3830.59 ; 6710.14,3830.59 6873.11,3809.54 ; 6725.63,1785.3 ccw(c6722.62,1787.84) 6725.85,1785.6 ; 6725.63,1785.3 ccw(c6722.62,1787.84) 6725.85,1785.6 ; 6725.85,1785.6 6748.78,1818.74 ; 6748.78,1818.74 ccw(c6745.54,1820.98) 6748.96,1819.04 ; 6748.78,1818.74 ccw(c6745.54,1820.98) 6748.96,1819.03 ; 6748.96,1819.03 ccw(c6745.54,1820.98) 6748.97,1819.04 ; 6748.96,1819.03 6748.96,1819.04 ; 6748.96,1819.04 6748.97,1819.04 ; 6748.97,1819.04 6770.45,1856.9 ; 6770.45,1856.9 ccw(c6767.03,1858.85) 6770.46,1856.91 ; 6770.46,1856.91 ccw(c6767.03,1858.85) 6770.6,1857.18 ; 6770.45,1856.91 ccw(c6767.03,1858.85) 6770.6,1857.19 ; 6770.45,1856.9 6770.45,1856.91 ; 6770.45,1856.91 6770.46,1856.91 ; 6770.6,1857.18 6770.6,1857.19 ; 6770.6,1857.19 6791.19,1901.14 ; 6791.19,1901.15 ccw(c6787.62,1902.82) 6791.29,1901.38 ; 6791.19,1901.14 ccw(c6787.62,1902.82) 6791.29,1901.38 ; 6791.19,1901.14 6791.19,1901.15 ; 6791.29,1901.38 6812.39,1954.97 ; 6812.39,1954.97 ccw(c6808.73,1956.41) 6812.46,1955.14 ; 6812.39,1954.97 ccw(c6808.73,1956.41) 6812.46,1955.15 ; 6812.46,1955.14 6812.46,1955.15 ; 6812.46,1955.15 6842.58,2043.26 ; 6842.58,2043.26 ccw(c6838.86,2044.54) 6842.63,2043.4 ; 6842.59,2043.27 ccw(c6838.86,2044.54) 6842.63,2043.42 ; 6842.58,2043.26 6842.59,2043.27 ; 6842.63,2043.4 6842.63,2043.42 ; 6842.63,2043.42 6885.31,2184.25 ; 6873.11,3809.54 cw(c6872.6,3805.63) 6873.16,3809.53 ; 6873.11,3809.54 cw(c6872.6,3805.63) 6873.16,3809.53 ; 6873.16,3809.53 7196.78,3763.03 ; 6885.31,2184.25 ccw(c6881.55,2185.41) 6885.33,2184.3 ; 6885.32,2184.26 ccw(c6881.55,2185.41) 6885.33,2184.3 ; 6885.31,2184.25 6885.32,2184.26 ; 6885.33,2184.3 ccw(c6881.55,2185.41) 6885.33,2184.3 ; 6885.33,2184.3 6885.33,2184.3 ; 6885.33,2184.3 6885.33,2184.3 ; 6885.33,2184.3 6961.63,2444.62 ; 6961.63,2444.62 6997.86,2560.31 7008.93,2588.6 7023.74,2614.95 7042.06,2639.01 7063.53,2660.29 7087.75,2678.39 7114.24,2692.97 7142.49,2703.73 7171.97,2710.47 7202.35,2713.09 ; 7196.78,3763.03 cw(c7196.22,3759.13) 7197.1,3762.97 ; 7196.78,3763.03 cw(c7196.22,3759.13) 7197.11,3762.97 ; 7197.1,3762.97 7197.11,3762.97 ; 7197.11,3762.97 7224.19,3756.81 ; 7202.34,2713.09 ccw(c7202.02,2717.02) 7202.6,2713.12 ; 7202.36,2713.09 ccw(c7202.02,2717.02) 7202.6,2713.12 ; 7202.35,2713.09 7202.36,2713.09 ; 7202.6,2713.12 7222.53,2716.07 ; 7222.53,2716.07 ccw(c7221.96,2719.96) 7223.52,2716.35 ; 7222.53,2716.07 ccw(c7221.96,2719.96) 7223.52,2716.35 ; 7223.52,2716.35 7242.02,2724.32 ; 7224.2,3756.8 cw(c7223.33,3752.96) 7224.81,3756.61 ; 7224.19,3756.81 cw(c7223.33,3752.96) 7224.81,3756.61 ; 7224.19,3756.81 7224.2,3756.8 ; 7224.81,3756.61 7250.57,3746.15 ; 7242.02,2724.32 ccw(c7240.46,2727.93) 7242.9,2724.84 ; 7242.02,2724.32 ccw(c7240.46,2727.93) 7242.9,2724.84 ; 7242.9,2724.84 7258.73,2737.31 ; 7250.57,3746.15 cw(c7249.08,3742.5) 7251.13,3745.86 ; 7250.57,3746.15 cw(c7249.08,3742.5) 7251.15,3745.85 ; 7251.13,3745.86 7251.15,3745.85 ; 7251.15,3745.85 7274.84,3731.4 ; 7258.73,2737.31 ccw(c7256.3,2740.4) 7259.16,2737.7 ; 7258.73,2737.31 ccw(c7256.3,2740.4) 7259.16,2737.69 ; 7259.16,2737.69 ccw(c7256.3,2740.4) 7259.17,2737.71 ; 7259.16,2737.69 7259.16,2737.7 ; 7259.16,2737.7 7259.17,2737.71 ; 7259.17,2737.71 7345.11,2828.92 ; 7274.84,3731.4 cw(c7272.81,3728.02) 7275.38,3731.01 ; 7274.86,3731.39 cw(c7272.81,3728.02) 7275.38,3731.01 ; 7274.84,3731.4 7274.86,3731.39 ; 7275.38,3731.01 7296.46,3712.89 ; 7296.46,3712.89 cw(c7293.89,3709.91) 7296.91,3712.44 ; 7296.46,3712.89 cw(c7293.89,3709.91) 7296.9,3712.45 ; 7296.92,3712.43 ccw(c7293.89,3709.91) 7296.9,3712.45 ; 7296.92,3712.43 7314.79,3691.17 ; 7296.91,3712.44 7296.92,3712.43 ; 7296.9,3712.45 7296.91,3712.44 ; 7314.8,3691.15 cw(c7311.78,3688.63) 7315.16,3690.64 ; 7314.8,3691.15 ccw(c7311.78,3688.63) 7314.79,3691.17 ; 7314.79,3691.16 cw(c7311.78,3688.63) 7315.16,3690.64 ; 7314.79,3691.16 7314.8,3691.15 ; 7314.79,3691.17 7314.79,3691.16 ; 7315.17,3690.63 ccw(c7311.78,3688.63) 7315.16,3690.64 ; 7315.17,3690.63 7329.37,3666.76 ; 7315.16,3690.64 7315.17,3690.63 ; 7315.16,3690.64 7315.16,3690.64 ; 7329.37,3666.76 cw(c7325.99,3664.74) 7329.38,3666.74 ; 7329.37,3666.76 7329.38,3666.75 ; 7329.38,3666.74 cw(c7325.99,3664.74) 7329.66,3666.18 7329.66,3666.17 ; 7329.38,3666.75 cw(c7325.99,3664.74) 7329.66,3666.17 ; 7329.38,3666.75 7329.38,3666.74 ; 7329.66,3666.17 7339.83,3640.32 ; 7339.83,3640.32 cw(c7336.17,3638.87) 7340.02,3639.7 ; 7339.83,3640.31 cw(c7336.17,3638.87) 7340.02,3639.7 ; 7339.83,3640.32 7339.83,3640.31 ; 7340.02,3639.7 ccw(c7336.17,3638.87) 7340.02,3639.7 ; 7340.02,3639.7 7345.88,3612.53 ; 7340.02,3639.7 7340.02,3639.7 ; 7340.02,3639.7 7340.02,3639.7 ; 7345.11,2828.92 ccw(c7342.25,2831.62) 7345.12,2828.93 ; 7345.12,2828.92 ccw(c7342.25,2831.62) 7346.19,2831.62 ; 7345.11,2828.92 7345.12,2828.92 ; 7345.12,2828.92 7345.12,2828.93 ; 7345.12,2828.93 ccw(c7342.25,2831.62) 7346.19,2831.62 ; 7345.88,3612.53 cw(c7342.03,3611.7) 7345.97,3611.9 ; 7345.88,3612.53 ccw(c7342.03,3611.7) 7345.88,3612.53 ; 7345.88,3612.53 cw(c7342.03,3611.7) 7345.97,3611.9 ; 7345.88,3612.53 7345.88,3612.53 ; 7345.97,3611.9 7347.37,3584.13 ; 7346.19,2831.62 ccw(c7342.25,2831.62) 7346.19,2831.62 ; 7346.19,2831.62 7347.38,3583.93 ; 7347.37,3584.13 cw(c7343.44,3583.93) 7347.38,3583.93 ; 7347.37,3584.13 cw(c7343.44,3583.93) 7347.38,3583.93 ; 7347.38,3583.93 ccw(c7343.44,3583.93) 7347.38,3583.93 ; 7347.38,3583.93 ccw(c7343.44,3583.93) 7347.38,3583.93

## Other copper
Top Layer:
  text "This side faces out to the world; left is thermopile/power, right is STM and QRE." at 1525,4415 h40
  text "need to fix nose bridge to swap sides to match this" at 1500,4250 h40

## Silkscreen, mask and mechanical layers (free items; w line width, h text height)
Top Overlay:
  text "David and Patrick" at 2290,3590 h60
  text "Research@Scale 2019" at 2290,3495 h60
  text "GLASSES V2" at 4780,3290 h160 r10
Bottom Overlay:
  text "3" at 6340,3570 h80
  text "1" at 3010,3525 h80
  text "2" at 4705,3420 h80
  text "3.3V" at 7225,3390 h60
  text "BLINK" at 7220,3295 h35
  text "LED" at 7215,3245 h35
  text "BLINK" at 7225,3175 h35
  text "SIGNAL" at 7220,3130 h35
  text "GND" at 7215,3005 h60
  text "4" at 4065,2920 h80
  text "5" at 4690,2880 h80